# EAGLE board anchor (EAGLE 6.5.0)
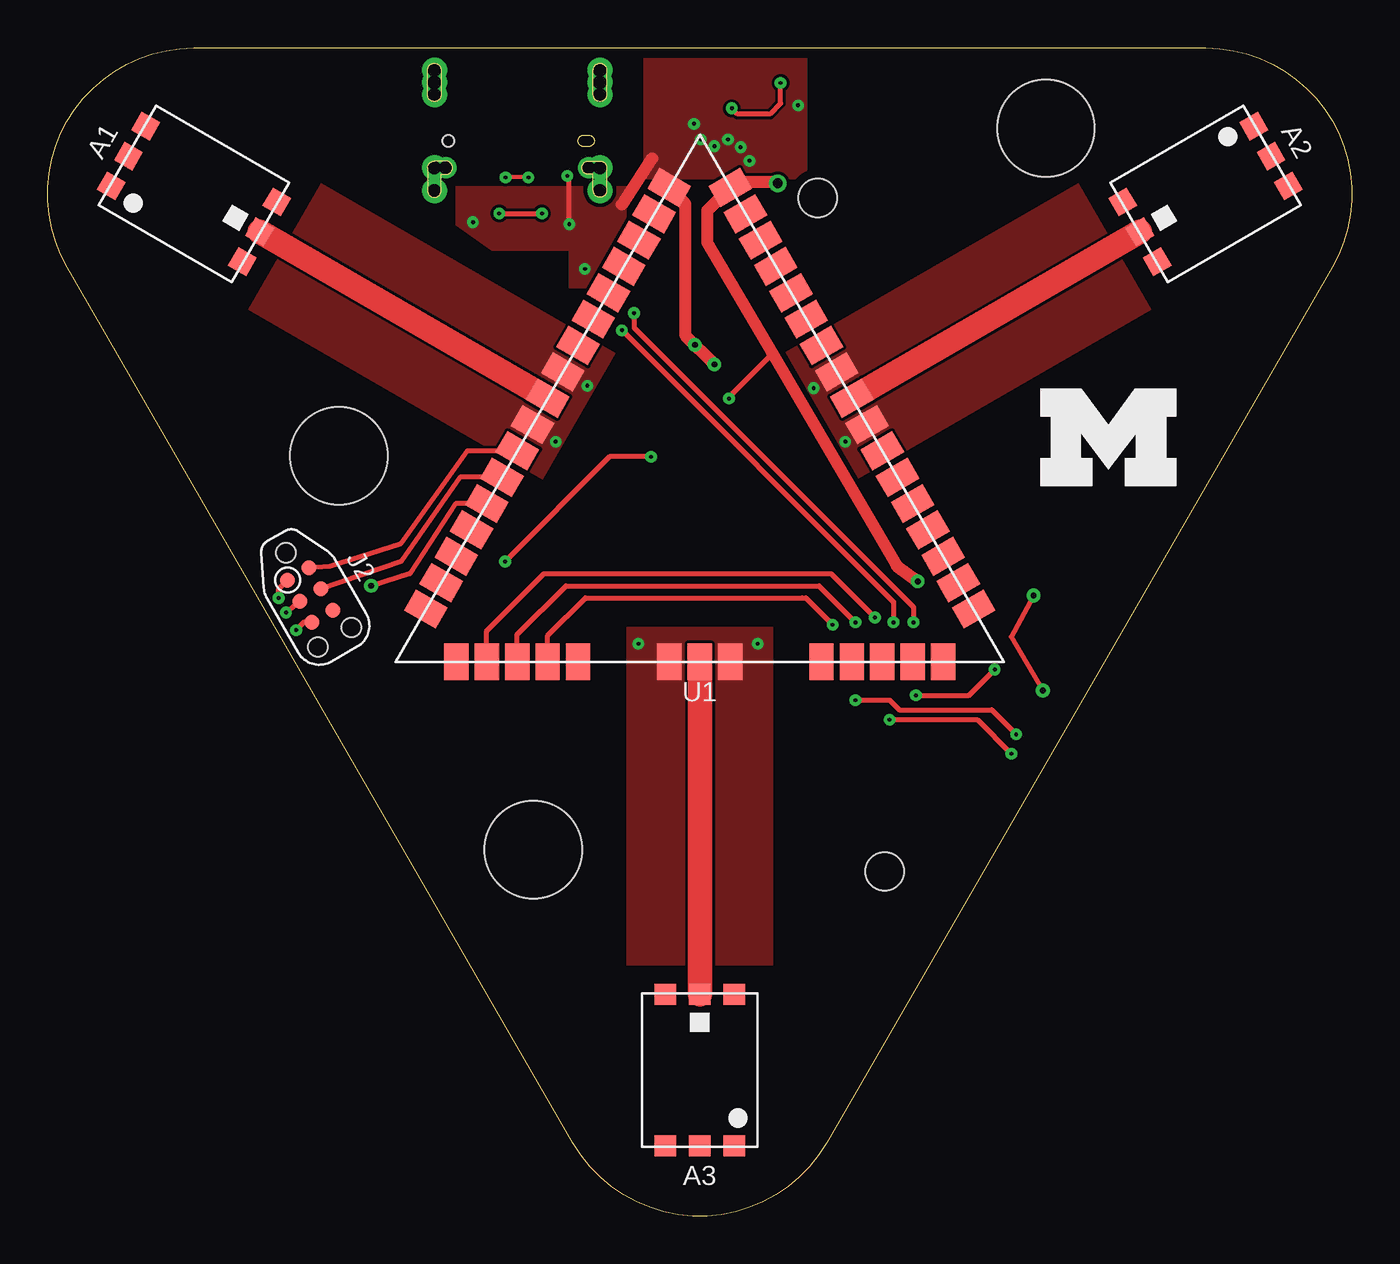
[diagram p0: board, top side]
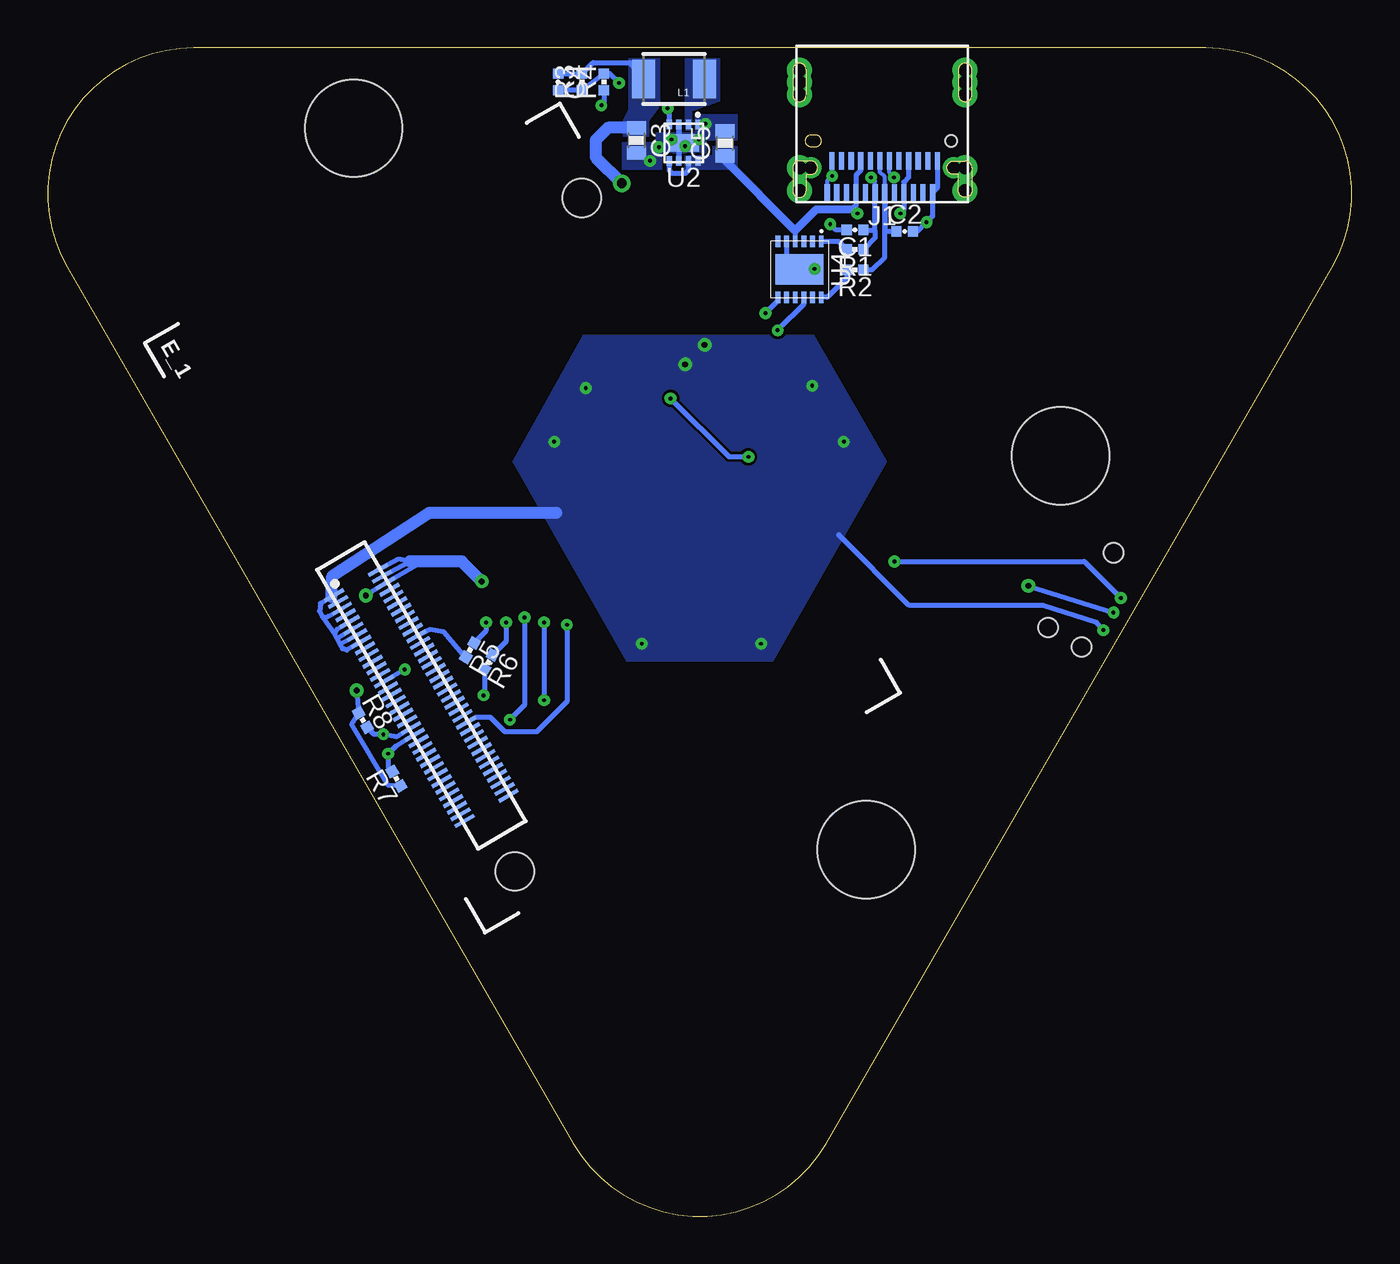
[diagram p1: board, bottom side, seen from below]

Size 68.02 x 60.95 mm. Coordinates in mm from the lower left corner, seen from the top.
Outline: 29.69,60.95 60.41,60.95 arc-120 67.01,49.52 40.61,3.8 arc-120 27.41,3.8 1.01,49.52 arc-120 7.61,60.95 19.28,60.95
Copper layers (1*16): Top 0.0178mm / dielectric 59mil / Bottom 0.0178mm
Design rules "sunstone-2lyr_v1.0.0.3": minimum track width 6mil, minimum drill 14mil, track to track 6mil, track to pad 6mil, pad to pad 6mil, via to via 6mil, smd to smd 6mil, copper to edge 20mil, drill to drill 16mil, minimum pad ring 8mil, minimum via ring 8mil, stop-mask expansion 3mil, vias tented up to drill 50mil, thermal gap 10mil
Holes 5.08 mm at 25.32,19.12 15.19,39.67 52.07,56.76

## Footprints (pad centres in the part's own frame; a part is rotated, then mirrored left to right if it is on the bottom)
TAIYO-YUDEN-AH086M = smd 1.1 x 1.1: A 0,-3.95; NC0 -1.8,3.95; NC1 0,3.95; NC2 1.8,3.95; NC3 1.8,-3.95; NC4 -1.8,-3.95
0402_CAP = smd 0.536 x 0.546: 1 -0.433,0; 2 0.433,0
0603_CAP = smd 0.7 x 1: 1 -0.65,0; 2 0.65,0
EDISON_DAUGHTER = smd 1.14 x 0.2: 1 1.98,19.17; 2 4.62,19.17; 3 1.98,18.77; 4 4.62,18.77; 5 1.98,18.37; 6 4.62,18.37; 7 1.98,17.97; 8 4.62,17.97; 9 1.98,17.57; 10 4.62,17.57; 11 1.98,17.17; 12 4.62,17.17; 13 1.98,16.77; 14 4.62,16.77; 15 1.98,16.37; 16 4.62,16.37; 17 1.98,15.97; 18 4.62,15.97; 19 1.98,15.57; 20 4.62,15.57; 21 1.98,15.17; 22 4.62,15.17; 23 1.98,14.77; 24 4.62,14.77; 25 1.98,14.37; 26 4.62,14.37; 27 1.98,13.97; 28 4.62,13.97; 29 1.98,13.57; 30 4.62,13.57; 31 1.98,13.17; 32 4.62,13.17; 33 1.98,12.77; 34 4.62,12.77; 35 1.98,12.37; 36 4.62,12.37; 37 1.98,11.97; 38 4.62,11.97; 39 1.98,11.57; 40 4.62,11.57; 41 1.98,11.17; 42 4.62,11.17; 43 1.98,10.77; 44 4.62,10.77; 45 1.98,10.37; 46 4.62,10.37; 47 1.98,9.97; 48 4.62,9.97; 49 1.98,9.57; 50 4.62,9.57; 51 1.98,9.17; 52 4.62,9.17; 53 1.98,8.77; 54 4.62,8.77; 55 1.98,8.37; 56 4.62,8.37; 57 1.98,7.97; 58 4.62,7.97; 59 1.98,7.57; 60 4.62,7.57; 61 1.98,7.17; 62 4.62,7.17; 63 1.98,6.77; 64 4.62,6.77; 65 1.98,6.37; 66 4.62,6.37; 67 1.98,5.97; 68 4.62,5.97; 69 1.98,5.57; 70 4.62,5.57 | hole 2: 23.53,30.67; 2.93,1.98
DX07S024JJ2 = smd 0.27 x 0.9: A1 -2.625,7.55; A2 -2.125,7.55; A3 -1.625,7.55; A4 -1.125,7.55; A5 -0.625,7.55; A6 -0.125,7.55; A7 0.375,7.55; A8 0.875,7.55; A9 1.375,7.55; A10 1.875,7.55; A11 2.375,7.55; A12 2.875,7.55; B1 2.625,5.9; B2 2.125,5.9; B3 1.625,5.9; B4 1.125,5.9; B5 0.625,5.9; B6 0.125,5.9; B7 -0.375,5.9; B8 -0.875,5.9; B9 -1.375,5.9; B10 -1.875,5.9; B11 -2.375,5.9; B12 -2.875,5.9 | drill 0.7 pad 1.3: P$1 -4.32,1.8; P$2 -4.32,2.45; P$3 -4.32,1.15; P$4 4.32,1.8; P$5 4.32,2.45; P$6 4.32,1.15; P$7 -4.32,6.25; P$9 -4.32,7.45; P$10 4.32,6.25; P$12 4.32,7.45 | drill 0.7 pad 1: P$8 -3.72,6.25; P$11 3.72,6.25 | hole 0.6: -3.6,4.85
TC2030-IDC-NL = smd 0.787 x 0.787: 1 -1.27,-0.635; 2 -1.27,0.635; 3 0,-0.635; 4 0,0.635; 5 1.27,-0.635; 6 1.27,0.635 | hole 1.016: -2.54,0; 2.54,1.016; 2.54,-1.016
1210 = smd 1.2 x 2: 1 -1.6,0; 2 1.6,0
0402_RES = smd 0.536 x 0.546: 1 -0.433,0; 2 0.433,0
TRIPOINT = smd 1.27 x 1.905 rotated 120: 1 -14.287,6.417; 2 -13.494,5.042; 3 -12.7,3.667; 4 -11.906,2.292; 5 -11.113,0.917; 6 -10.319,-0.458; 7 -9.525,-1.833; 8 -8.731,-3.208; 9 -7.938,-4.583; 10 -7.144,-5.958; 11 -6.35,-7.332; 12 -5.556,-8.707; 13 -4.763,-10.082; 14 -3.969,-11.457; 15 -3.175,-12.832; 16 -2.381,-14.207; 17 -1.587,-15.582 | smd 1.27 x 1.905 rotated 60: 18 1.587,-15.582; 19 2.381,-14.207; 20 3.175,-12.832; 21 3.969,-11.457; 22 4.763,-10.082; 23 5.556,-8.707; 24 6.35,-7.332; 25 7.144,-5.958; 26 7.938,-4.583; 27 8.731,-3.208; 28 9.525,-1.833; 29 10.319,-0.458; 30 11.113,0.917; 31 11.906,2.292; 32 12.7,3.667; 33 13.494,5.042; 34 14.287,6.417 | smd 1.27 x 1.905: 35 12.7,9.171; 36 11.113,9.171; 37 9.525,9.171; 38 7.938,9.171; 39 6.35,9.171; 42 1.587,9.171; 43 0,9.171; 44 -1.587,9.171; 47 -6.35,9.171; 48 -7.938,9.171; 49 -9.525,9.171; 50 -11.113,9.171; 51 -12.7,9.171
S-PWSON-N8 = smd 0.28 x 0.5: 1 -0.75,-0.95; 2 -0.25,-0.95; 3 0.25,-0.95; 4 0.75,-0.95; 5 0.75,0.95; 6 0.25,0.95; 7 -0.25,0.95; 8 -0.75,0.95 | smd 1.6 x 0.9: P$1 0,0
DFN-12/3MM = smd 0.6 x 0.25: 1 -1.45,1.13; 2 -1.45,0.68; 3 -1.45,0.23; 4 -1.45,-0.23; 5 -1.45,-0.68; 6 -1.45,-1.13; 7 1.45,-1.13; 8 1.45,-0.68; 9 1.45,-0.23; 10 1.45,0.23; 11 1.45,0.68; 12 1.45,1.13 | smd 1.6 x 2.5: 13 0,0

## Placement (x,y rotation side)
A1  TAIYO-YUDEN-AH086M  [TAIYO-YUDEN-AH086M]  7.62,53.33 60 top
A2  TAIYO-YUDEN-AH086M  [TAIYO-YUDEN-AH086M]  60.4,53.33 300 top
A3  TAIYO-YUDEN-AH086M  [TAIYO-YUDEN-AH086M]  34.01,7.61 180 top
C1  47pF  [0402_CAP]  25.91,51.45 180 bottom
C2  47pF  [0402_CAP]  23.32,51.38 0 bottom
C3  10uF  [0603_CAP]  37.31,56.13 270 bottom
C4  10pF  [0402_CAP]  41.4,59.17 270 bottom
C5  10uF  [0603_CAP]  32.69,55.97 90 bottom
E_1  EDISON_CONNECTOR_SEGMENTED  [EDISON_DAUGHTER]  45.21,14.8 30 bottom
J1  USB_C_JAE_DX07S024JJ2  [DX07S024JJ2]  24.49,60.95 180 bottom
J2  TC2030-JLINK-NL  [TC2030-IDC-NL]  13.69,32.4 300 top
L1  1uH  [1210]  35.36,59.33 180 bottom
LOGO1  UMICH_SOLID_MEDIUM  [UMICH_SOLID_200MIL]  51.79,38.09 0 top
R1  27  [0402_RES]  25.91,50.44 180 bottom
R2  27  [0402_RES]  25.91,49.37 180 bottom
R3  680k  [0402_RES]  40.16,59.17 90 bottom
R4  120k  [0402_RES]  39.01,59.17 90 bottom
R5  100  [0402_RES]  46,29.53 240 bottom
R6  100  [0402_RES]  45.03,28.9 240 bottom
R7  10k  [0402_RES]  49.84,22.83 120 bottom
R8  10k  [0402_RES]  51.59,25.87 300 bottom
U1  TRIPOINT  [TRIPOINT]  34.01,38.09 180 top
U2  TPS62065  [S-PWSON-N8]  34.85,56 180 bottom
U4  FTDI234XD  [DFN-12/3MM]  28.8,49.39 270 bottom

## Library data of the parts
A1-A3 = chips; DIGIKEY: 587-2204-1-ND
C1 C2 C4 R1-R8 = passives
C3 C5 = passives; DIGIKEY: 490-6405-1-ND
E_1 = Edison
J1 = connector; MOUSER: 656-DX07S024JJ2R1300
J2 = connector
L1 = SparkFun-Passives; DIGIKEY: 490-10767-1-ND
LOGO1 = logos
U1 = tripoint
U2 = chips; DIGIKEY: 296-39441-1-ND
U4 = chips; DIGIKEY: 768-1178-1-ND; MOUSER: 895-FT234XD-R; NEWARK: 53X3171

## Nets
D+: C2.1 J1.A6 J1.B6 R2.1
D-: C1.1 J1.A7 J1.B7 R1.1
DW_INT: E_1.48 U1.38
EDISON_UART_RX: E_1.22 R5.2
EDISON_UART_TX: E_1.27 R6.2
GND: C1.2 C2.2 C3.2 C5.2 E_1.1 E_1.5 E_1.9 E_1.11 E_1.13 E_1.15 J1.A1 J1.A12 J1.B1 J1.B12 J2.5 R4.1 U1.8 U1.10 U1.18 U1.25 U1.27 U1.42 U1.44 U2.1 U2.3 U2.6 U2.P$1 U4.5 U4.13
N$1: L1.1 U2.2
N$2: R5.1 U4.7
N$5: J2.2 U1.28
N$6: R1.2 U4.1
N$7: R2.2 U4.12
N$8: C4.2 R3.1 R4.2 U2.4
N$9: R6.1 U4.10
N$10: A2.A U1.9
N$11: A1.A U1.26
N$12: A3.A U1.43
N$13: J2.4 U1.29
N$14: J2.3 U1.30
SCL: E_1.41 R8.2 U1.37
SDA: E_1.43 R7.2 U1.36
VBUS: C5.1 J1.A4 J1.A9 J1.B4 J1.B9 U2.5 U2.7 U2.8 U4.4
VCC: C3.1 C4.1 E_1.2 E_1.4 E_1.6 J2.1 L1.2 R3.2 R7.1 R8.1 U1.17

## Tracks (layer width: path | path; a pad name or v marks a point on that pad's centre or on a via)
D+
  Bottom 0.203: J1.A6 24.36,54.22 24.61,54.47 J1.B6
  Bottom 0.254: C2.1 24.34,51.38 24.36,51.4 J1.A6 24.36,50.03 25.02,49.37 R2.1
D-  (via drill 0.2)
  Top 0.203: v25.07,54.2 v23.88,54.2
  Bottom 0.203: J1.A7 24.86,53.99 v25.07,54.2 | v23.88,54.2 24.11,54.43 J1.B7
  Bottom 0.254: 24.86,51.38 J1.A7 | 24.86,51.38 24.86,51.05 R1.1 | C1.1 24.93,51.45 24.86,51.38
DW_INT  (via drill 0.2)
  Top 0.254: U1.38 26.07,30.28 28.04,32.25 39.35,32.25 39.55,32.25 v40.95,30.85
  Bottom 0.254: v40.95,30.85 40.95,26.84 42.52,25.26 44.17,25.26 44.93,26.03 45.7,26.03 E_1.48
EDISON_UART_RX
  Bottom 0.254: R5.2 47.35,30.47 48.11,30.6 E_1.22
EDISON_UART_TX  (via drill 0.2)
  Top 0.254: v45.29,27.17 48.06,27.17 v49.4,28.52
  Bottom 0.203: 45.23,27.23 v45.29,27.17
  Bottom 0.254: v49.4,28.52 E_1.27 | R6.2 45.23,27.23
GND  (via drill 0.2, 0.3)
  Top 0.254: v27.2,51.76 27.2,54.17 v27.1,54.27 | J2.5 13.37,30.98 v12.95,30.57
  Top 0.635: 31.52,55.19 29.95,52.77 | U1.18 32.42,53.65 33.25,52.82 33.25,45.97 v34.77,44.44
  Bottom 0.203: J1.B1 v27.11,54.26 | v27.11,54.26 27.36,54.01 J1.A12 | v27.11,54.26 | v27.11,54.26 v27.1,54.27
  Bottom 0.254: J1.B12 21.61,53.65 J1.A1 21.86,52.17 v22.18,51.86 22.66,51.38 C2.2 | R4.1 39.02,58.08 v39.14,57.95 | C1.2 26.9,51.45 v27.2,51.76 | v28.02,49.42 28.78,49.42 U4.13 29.48,50.07 U4.5 | E_1.1 53.22,32.31 53.8,31.97 53.85,31.56 53.7,31.26 | 53.7,31.26 53.39,31.28 E_1.5 | E_1.15 52.43,29.53 52.66,29.61 52.77,29.82 | 52.77,29.82 52.94,30.15 | 52.94,30.15 53.06,30.37 | 53.06,30.37 52.93,30.62 E_1.9 | 53.7,31.26 53.06,30.37 | E_1.13 52.77,29.82 | E_1.11 52.94,30.15 | v12.95,30.57 13.31,30.98 16.1,31.87 23.09,31.87 26.77,35.55
  Bottom 0.279: U2.6 35.1,55.87 | U2.3 35.1,56 U2.P$1
  Bottom 0.635: 53.22,32.31 53.19,33.39 48.11,36.69 41.5,36.69
  other vias: 34.06,56.18 34.77,55.82 35.48,56.18 36.14,55.77 36.6,55.06 33.71,56.99 26.49,40.4 28.14,43.32 39.95,43.2 41.61,40.4 37.03,29.86 30.81,29.86 33.76,45.46
  pour Top (no thermals): 37.82,30.73 30.2,30.73 30.2,13.09 37.82,13.09
  pour Top (no thermals): 14.27,53.89 10.46,47.29 25.81,38.43 29.62,45.03
  pour Top (no thermals): 57.57,47.29 53.76,53.89 38.49,45.07 42.3,38.48
  pour Bottom (no thermals): 33.66,56.13 32.03,56.13 32.03,57.5 34.27,57.5 34.27,56.53 36.3,56.53 36.3,56.02 38.08,56.02 38.08,54.6 35.99,54.6 35.99,55.47 33.66,55.47
  pour Top (no thermals): 31.06,60.44 31.06,54.09 39.6,54.09 39.6,60.44
  pour Top (no thermals): 21.26,53.74 30.2,53.74 30.2,52.11 28.07,48.4 27.2,48.4 27.2,50.39 23.14,50.39 21.26,51.71
  pour Bottom (no thermals): 28.04,45.97 40.11,45.97 43.79,39.36 37.82,28.95 30.2,28.95 24.23,39.36
N$1
  pour Bottom (no thermals): 34.42,57.5 34.42,56.58 34.77,56.58 34.77,60.49 32.94,60.49 32.94,58.16 34.42,57.65
N$2  (via drill 0.2)
  Top 0.254: v30.58,47.11 30.58,46.35 45.16,31.77 v45.16,30.98
  Bottom 0.254: U4.7 29.93,47.76 v30.58,47.11 | v45.16,30.98 45.16,30.53 R5.1
N$5
  Top 0.254: U1.28 21.87,39.92 18.39,35.07 14.71,33.9 J2.2
N$6
  Bottom 0.254: R1.2 26.75,50.84 U4.1
N$7
  Bottom 0.254: R2.2 26.34,48.96 27.36,47.94 U4.12
N$8  (via drill 0.2)
  Top 0.254: v38.23,59.12 38.23,58.06 37.67,57.5 35.99,57.5 v35.69,57.8
  Bottom 0.254: C4.2 R3.1 R4.2 38.71,59.61 v38.23,59.12 | U2.4 35.6,57.71 v35.69,57.8
N$9  (via drill 0.2)
  Top 0.254: v29.95,46.22 44.12,32.05 v44.12,30.98
  Bottom 0.254: U4.10 28.57,47.59 v29.95,46.22 | v44.12,30.98 44.12,29.97 R6.1
N$10
  Top 1.27: U1.9 A2.A
N$11
  Top 1.27: U1.26 A1.A
N$12
  Top 1.27: U1.43 A3.A
N$13
  Top 0.254: U1.29 21.52,38.55 18.44,34.15 J2.4
N$14  (via drill 0.2, 0.3)
  Top 0.254: U1.30 21.28,37.17 18.9,33.52 v16.87,32.88 | v12.42,31.49 J2.3
  Bottom 0.254: v16.87,32.88 v12.42,31.49
SCL  (via drill 0.2)
  Top 0.254: v42.14,26.92 43.92,26.92 44.43,26.41 49.25,26.41 v50.52,25.14 | U1.37 24.49,30.34 27.03,32.88 40.23,32.88 v42.14,30.98
  Bottom 0.254: v42.14,30.98 v42.14,26.92 | R8.2 51.01,25.14 v50.52,25.14 49.84,25.01 E_1.41
SDA  (via drill 0.2)
  Top 0.254: v43.92,25.9 48.49,25.9 v50.27,24.12 | U1.36 22.9,30.54 25.88,33.52 40.87,33.52 v43.16,31.23
  Bottom 0.254: v43.16,31.23 43.16,26.66 v43.92,25.9 | R7.2 50.27,23.42 v50.27,24.12 49.89,24.5 E_1.43
VBUS  (via drill 0.2)
  Top 0.254: v23.55,52.32 v25.78,52.32
  Bottom 0.254: J1.B4 25.61,54.57 25.86,54.32 J1.A9 25.86,52.74 26.09,52.52 25.88,52.32 v25.78,52.32 | J1.B9 23.11,54.2 23.36,53.95 J1.A4 23.36,52.5 v23.55,52.32 | 29.03,51.43 U4.4 | U2.7 34.6,54.57 34.77,54.4 35.43,54.4 35.6,54.56 U2.5
  Bottom 0.406: C5.1 32.69,55.08 29.03,51.43 27.94,52.52 26.09,52.52
  pour Bottom (no thermals): 33.35,55.82 32.03,55.82 32.03,54.6 34.82,54.6 34.82,55.36 33.35,55.36
VCC  (via drill 0.2, 0.3, 0.51)
  Top 0.254: v51.44,32.38 50.27,30.22 v51.92,27.42 | 37.79,45 35.54,42.74 v35.54,42.66 | v31.47,39.62 29.31,39.62 v23.85,34.15 | v12.04,32.25 12.04,32.72 J2.1
  Top 0.635: v38.08,53.89 38.02,53.94 35.87,53.94 U1.17 34.39,52.47 34.39,50.79 37.79,45 44.3,33.93 v45.39,33.11
  Bottom 0.254: C4.1 R3.2 39.58,60.19 37.67,60.19 L1.2 | R7.1 50.27,22.47 52.17,25.65 R8.1 v51.92,27.42 | E_1.2 49.76,34.28 49.12,34.15 E_1.4 | 48.46,34.15 E_1.6 v51.44,32.38 | v35.54,42.66 32.49,39.62 v31.47,39.62 | v23.85,34.15 13.95,34.15 v12.04,32.25
  Bottom 0.635: C3.1 38.8,56.78 39.45,56.13 39.45,55.26 v38.08,53.89 | v45.39,33.11 46.43,34.15 48.46,34.15 49.12,34.15
  pour Bottom (no thermals): 36.09,60.44 37.72,60.44 37.72,57.75 38.02,57.14 38.02,56.33 36.65,56.33 36.65,57.14 36.09,57.9